# Altium PCB SCMLI_Snipped.PcbDoc (part 5 of 5)
Units mil, origin at the board's own origin, x right, y up, seen from the top; angles counter-clockwise.
Board outline 12129 x 3278 mil, 4 copper layers (Top Layer, GNDPlane, PowRet, Bottom Layer), stack 25.6 mil thick; 452 components, 391 nets, 1786 pads, 827 vias.
Unrouted connection lines stored in the file: 1.
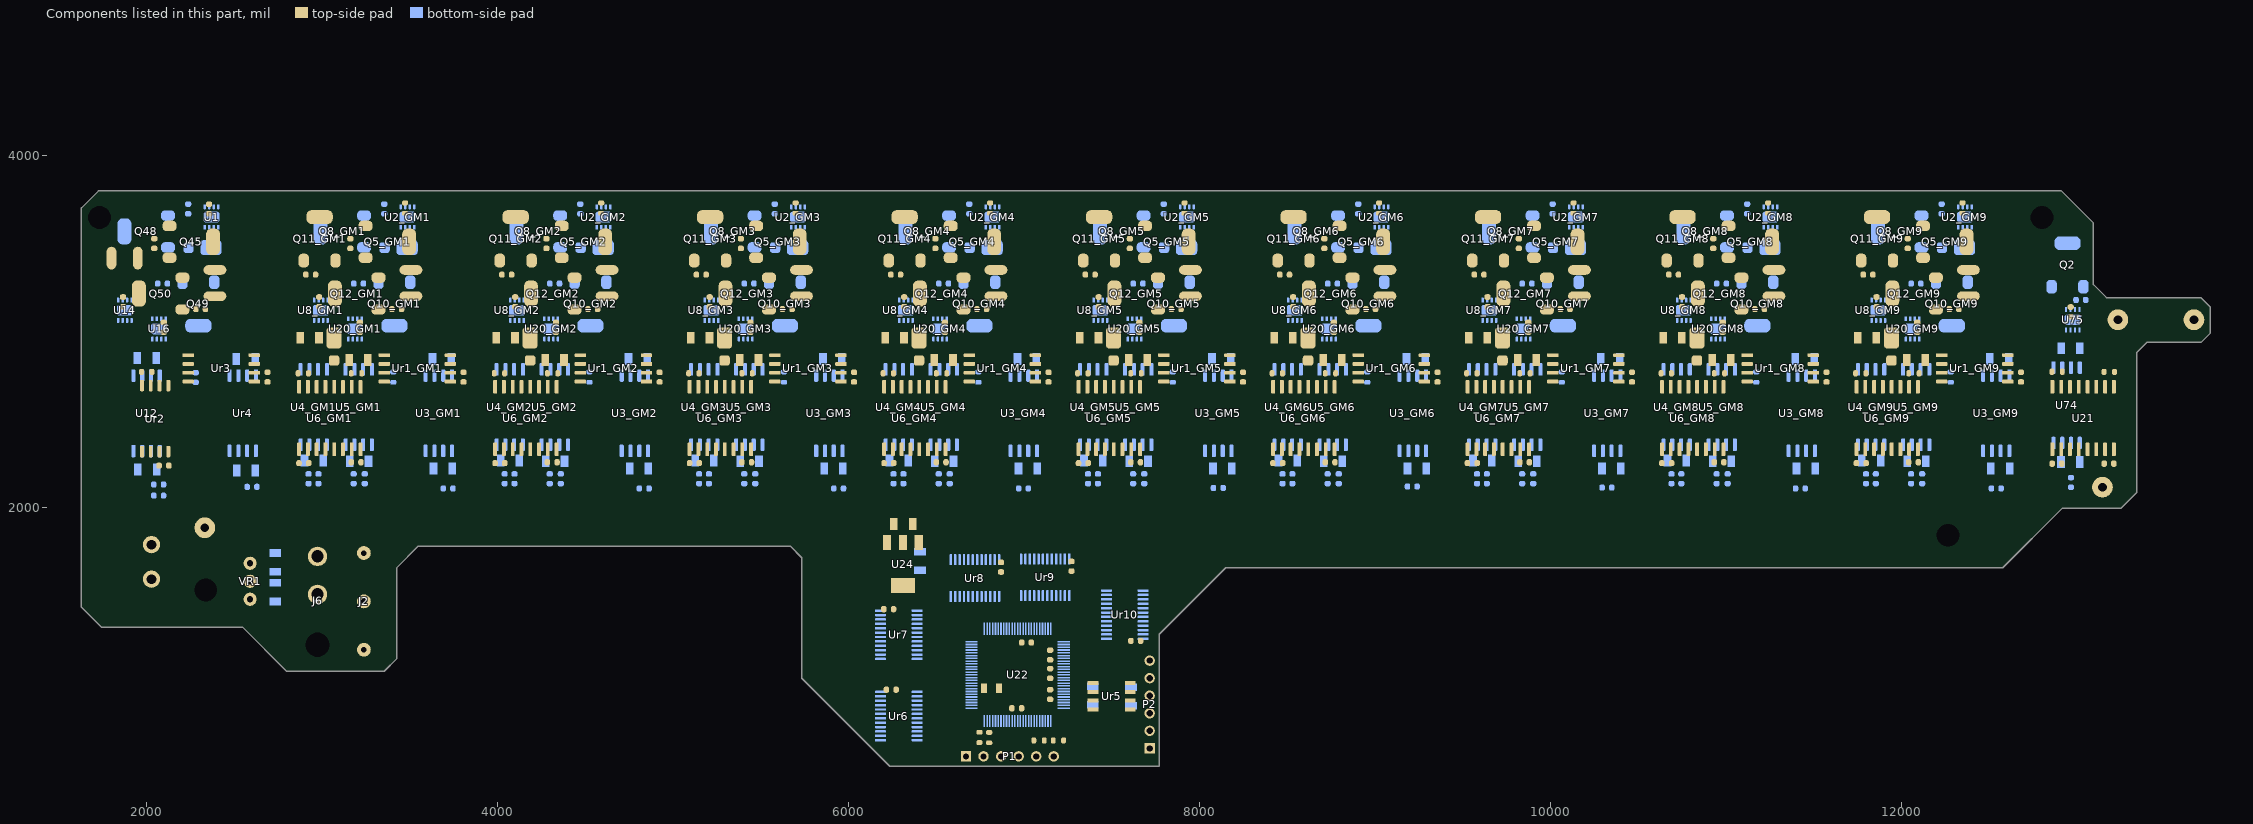
[diagram p7: the components of this part, seen from the top]

## Polygon pours and split planes (outlines as drawn) (continued)
GND on Top Layer "Top Layer-No Net" (solid, pour order 160): 8458,2356 8458,2395 8433,2420 8433,2431 8437,2435 8501.34,2435 8506.34,2430 8506.34,2420 8480,2393.66 8480,2356
REFA_GM5 on Top Layer "Top Layer-No Net" (solid, pour order 98): 7894,3664 7894,3680 cw(c7901,3680) 7901,3687 7960.17,3687 cw(c7960.17,3680) 7967.17,3680 ccw(c7985.17,3680) 7985.17,3662 7989,3662 cw(c7989,3660) 7991,3660 7991,3642 7900,3642 cw(c7900,3648) 7894,3648 7894,3664
REFB_5V_GM5 on Top Layer "Top Layer-No Net" (solid, pour order 107): 7404,2998 7447,2998 ccw(c7447,3013) 7462,3013 cw(c7473,3013) 7473,3024 7508,3024 cw(c7508,3022) 7510,3022 7510,2902 7483,2902 cw(c7483,2922) 7463,2922 ccw(c7454.5,2922) 7454.5,2930.5 7402.5,2930.5 cw(c7402.5,2939) 7394,2939 7394,2988 cw(c7404,2988)
REFC_5V_GM5 on Top Layer "Top Layer-No Net" (solid, pour order 125): 7322,2682 7322,2642 ccw(c7334,2642) 7334,2630 7338,2630 cw(c7338,2625) 7343,2625 7343,2600 cw(c7334,2600) 7334,2591 7309,2591 cw(c7309,2600) 7300,2600 7300,2682
REFA_GM5 on Top Layer "Top Layer-No Net" (solid, pour order 134): 8076,2879 8105,2908 8105,2838 8125.5,2817.5 8105,2797 8105,2740 8120,2725 8171,2725 8181,2715 8181,2704.07 8095.93,2704.07 8095.92,2704.07 cw(c8095.92,2724) 8076,2724
+5V on Top Layer "Top Layer-No Net" (solid, pour order 143): 7287,2367 7292,2372 7318,2372 7322,2368 7322,2236 7315.55,2229.55 7291.45,2229.55 7287,2234
+5V on Top Layer "Top Layer-No Net" (solid, pour order 152): 7550,2366 7552,2368 7621,2368 7624,2365 7624,2241 7620,2237 7556,2237 7550,2243
GND on Top Layer "Top Layer-No Net" (solid, pour order 161): 7350,2356 7350,2395 7325,2420 7325,2431 7329,2435 7393.34,2435 7398.34,2430 7398.34,2420 7372,2393.66 7372,2356
REFA_GM4 on Top Layer "Top Layer-No Net" (solid, pour order 99): 6786,3664 6786,3680 cw(c6793,3680) 6793,3687 6852.17,3687 cw(c6852.17,3680) 6859.17,3680 ccw(c6877.17,3680) 6877.17,3662 6881,3662 cw(c6881,3660) 6883,3660 6883,3642 6792,3642 cw(c6792,3648) 6786,3648 6786,3664
REFB_5V_GM4 on Top Layer "Top Layer-No Net" (solid, pour order 108): 6296,2998 6339,2998 ccw(c6339,3013) 6354,3013 cw(c6365,3013) 6365,3024 6400,3024 cw(c6400,3022) 6402,3022 6402,2902 6375,2902 cw(c6375,2922) 6355,2922 ccw(c6346.5,2922) 6346.5,2930.5 6294.5,2930.5 cw(c6294.5,2939) 6286,2939 6286,2988 cw(c6296,2988)
REFC_5V_GM4 on Top Layer "Top Layer-No Net" (solid, pour order 126): 6214,2682 6214,2642 ccw(c6226,2642) 6226,2630 6230,2630 cw(c6230,2625) 6235,2625 6235,2600 cw(c6226,2600) 6226,2591 6201,2591 cw(c6201,2600) 6192,2600 6192,2682
REFA_GM4 on Top Layer "Top Layer-No Net" (solid, pour order 135): 6968,2879 6997,2908 6997,2838 7017.5,2817.5 6997,2797 6997,2740 7012,2725 7063,2725 7073,2715 7073,2704.07 6987.93,2704.07 6987.92,2704.07 cw(c6987.92,2724) 6968,2724
+5V on Top Layer "Top Layer-No Net" (solid, pour order 144): 6179,2367 6184,2372 6210,2372 6214,2368 6214,2236 6207.55,2229.55 6183.45,2229.55 6179,2234
+5V on Top Layer "Top Layer-No Net" (solid, pour order 153): 6442,2366 6444,2368 6513,2368 6516,2365 6516,2241 6512,2237 6448,2237 6442,2243
GND on Top Layer "Top Layer-No Net" (solid, pour order 162): 6242,2356 6242,2395 6217,2420 6217,2431 6221,2435 6285.34,2435 6290.34,2430 6290.34,2420 6264,2393.66 6264,2356
GND on Top Layer "Top Layer-No Net" (solid, pour order 163): 2909,2356 2909,2395 2884,2420 2884,2431 2888,2435 2952.34,2435 2957.34,2430 2957.34,2420 2931,2393.66 2931,2356
+5V on Top Layer "Top Layer-No Net" (solid, pour order 154): 3109,2366 3111,2368 3180,2368 3183,2365 3183,2241 3179,2237 3115,2237 3109,2243
+5V on Top Layer "Top Layer-No Net" (solid, pour order 145): 2846,2367 2851,2372 2877,2372 2881,2368 2881,2236 2874.55,2229.55 2850.45,2229.55 2846,2234
REFA_GM1 on Top Layer "Top Layer-No Net" (solid, pour order 136): 3635,2879 3664,2908 3664,2838 3684.5,2817.5 3664,2797 3664,2740 3679,2725 3730,2725 3740,2715 3740,2704.07 3654.93,2704.07 3654.92,2704.07 cw(c3654.92,2724) 3635,2724
REFC_5V_GM1 on Top Layer "Top Layer-No Net" (solid, pour order 127): 2881,2682 2881,2642 ccw(c2893,2642) 2893,2630 2897,2630 cw(c2897,2625) 2902,2625 2902,2600 cw(c2893,2600) 2893,2591 2868,2591 cw(c2868,2600) 2859,2600 2859,2682
REFB_5V_GM1 on Top Layer "Top Layer-No Net" (solid, pour order 109): 2963,2998 3006,2998 ccw(c3006,3013) 3021,3013 cw(c3032,3013) 3032,3024 3067,3024 cw(c3067,3022) 3069,3022 3069,2902 3042,2902 cw(c3042,2922) 3022,2922 ccw(c3013.5,2922) 3013.5,2930.5 2961.5,2930.5 cw(c2961.5,2939) 2953,2939 2953,2988 cw(c2963,2988)
REFA_GM1 on Top Layer "Top Layer-No Net" (solid, pour order 100): 3453,3664 3453,3680 cw(c3460,3680) 3460,3687 3519.17,3687 cw(c3519.17,3680) 3526.17,3680 ccw(c3544.17,3680) 3544.17,3662 3548,3662 cw(c3548,3660) 3550,3660 3550,3642 3459,3642 cw(c3459,3648) 3453,3648 3453,3664
+5V on Top Layer "Top Layer-No Net 1" (solid, pour order 208): 6243,1850 6263,1870 6263,1936 6234.55,1936 6196,1897.45 6196,1826 6243,1826
GND on Top Layer "Top Layer-No Net 1" (solid, pour order 210): 6377,1850 6357,1870 6357,1936 6385.45,1936 6424,1897.45 6424,1826 6377,1826
3V3 on Top Layer "Top Layer-No Net 1" (solid, pour order 212): 6286,1754 6286,1641 6241,1596 6241,1509 6380,1509 6380,1557 6442,1619 6442,1661 6353,1661 6334,1680 6334,1754
MCLR on Top Layer "Top Layer-No Net 1" (solid, pour order 216): 7114,688 7165,688 7180,673 7180,590 7155,590 7155,612 7114,653
REFA1 on Top Layer "Top Layer-No Net" (solid, pour order 218): 2518,2879 2547,2908 2547,2838 2567.5,2817.5 2547,2797 2547,2740 2562,2725 2613,2725 2623,2715 2623,2704.07 2537.93,2704.07 2537.92,2704.07 cw(c2537.92,2724) 2518,2724
REFC_5V_GM1 on Top Layer "Top Layer-No Net" (solid, pour order 220): 18 vertices, not listed, extent 3039,2594 3200,2911.71
REFC_5V_GM2 on Top Layer "Top Layer-No Net" (solid, pour order 222): 18 vertices, not listed, extent 4156,2594 4317,2911.71
REFC_5V_GM4 on Top Layer "Top Layer-No Net" (solid, pour order 224): 18 vertices, not listed, extent 6372,2594 6533,2911.71
REFC_5V_GM5 on Top Layer "Top Layer-No Net" (solid, pour order 226): 18 vertices, not listed, extent 7480,2594 7641,2911.71
REFC_5V_GM6 on Top Layer "Top Layer-No Net" (solid, pour order 228): 18 vertices, not listed, extent 8588,2594 8749,2911.71
REFC_5V_GM7 on Top Layer "Top Layer-No Net" (solid, pour order 230): 18 vertices, not listed, extent 9696,2594 9857,2911.71
REFC_5V_GM8 on Top Layer "Top Layer-No Net" (solid, pour order 232): 18 vertices, not listed, extent 10804,2594 10965,2911.71
REFC_5V_GM9 on Top Layer "Top Layer-No Net" (solid, pour order 234): 18 vertices, not listed, extent 11912,2594 12073,2911.71
OUT_LOW10 on Bottom Layer "Top Layer-No Net" (solid, pour order 205): 12825,3101 12825,3254 12853.46,3254 12854.45,3254.98 12883,3254.98 12883,3110 12904,3089 12904,3082.5 12806.5,3082.5
OUT_LOW10 on Bottom Layer "Top Layer-No Net" (solid, pour order 204): 12855,3012 12833,3034 12902,3034 12902,2966 12931,2937 12931,2870 12913,2870 12876,2833 12876,2816 12857,2816 12855,2818
GND on Bottom Layer "Top Layer-No Net" (solid, pour order 200): 13112,2348.48 13112,2391.5 13096,2407.5 13096,2431.5 13102,2437.5 13148,2437.5 13153,2432.5 13153,2409.5 13134,2390.5 13134,2348.48
GND on Bottom Layer "Top Layer-No Net" (solid, pour order 199): 12856,2351.98 12856,2395 12840,2411 12840,2435 12846,2441 12892,2441 12897,2436 12897,2413 12878,2394 12878,2351.98
GND on Bottom Layer "Top Layer-No Net" (solid, pour order 164): 3984,2351.98 3984,2395 3968,2411 3968,2435 3974,2441 4020,2441 4025,2436 4025,2413 4006,2394 4006,2351.98
GND on Bottom Layer "Top Layer-No Net" (solid, pour order 173): 4240,2348.48 4240,2391.5 4224,2407.5 4224,2431.5 4230,2437.5 4276,2437.5 4281,2432.5 4281,2409.5 4262,2390.5 4262,2348.48
GND on Bottom Layer "Top Layer-No Net" (solid, pour order 165): 5092,2351.98 5092,2395 5076,2411 5076,2435 5082,2441 5128,2441 5133,2436 5133,2413 5114,2394 5114,2351.98
GND on Bottom Layer "Top Layer-No Net" (solid, pour order 174): 5348,2348.48 5348,2391.5 5332,2407.5 5332,2431.5 5338,2437.5 5384,2437.5 5389,2432.5 5389,2409.5 5370,2390.5 5370,2348.48
GND on Bottom Layer "Top Layer-No Net" (solid, pour order 166): 10632,2351.98 10632,2395 10616,2411 10616,2435 10622,2441 10668,2441 10673,2436 10673,2413 10654,2394 10654,2351.98
GND on Bottom Layer "Top Layer-No Net" (solid, pour order 175): 10888,2348.48 10888,2391.5 10872,2407.5 10872,2431.5 10878,2437.5 10924,2437.5 10929,2432.5 10929,2409.5 10910,2390.5 10910,2348.48
GND on Bottom Layer "Top Layer-No Net" (solid, pour order 167): 11740,2351.98 11740,2395 11724,2411 11724,2435 11730,2441 11776,2441 11781,2436 11781,2413 11762,2394 11762,2351.98
GND on Bottom Layer "Top Layer-No Net" (solid, pour order 176): 11996,2348.48 11996,2391.5 11980,2407.5 11980,2431.5 11986,2437.5 12032,2437.5 12037,2432.5 12037,2409.5 12018,2390.5 12018,2348.48
GND on Bottom Layer "Top Layer-No Net" (solid, pour order 168): 9524,2351.98 9524,2395 9508,2411 9508,2435 9514,2441 9560,2441 9565,2436 9565,2413 9546,2394 9546,2351.98
GND on Bottom Layer "Top Layer-No Net" (solid, pour order 177): 9780,2348.48 9780,2391.5 9764,2407.5 9764,2431.5 9770,2437.5 9816,2437.5 9821,2432.5 9821,2409.5 9802,2390.5 9802,2348.48
GND on Bottom Layer "Top Layer-No Net" (solid, pour order 169): 8416,2351.98 8416,2395 8400,2411 8400,2435 8406,2441 8452,2441 8457,2436 8457,2413 8438,2394 8438,2351.98
GND on Bottom Layer "Top Layer-No Net" (solid, pour order 178): 8672,2348.48 8672,2391.5 8656,2407.5 8656,2431.5 8662,2437.5 8708,2437.5 8713,2432.5 8713,2409.5 8694,2390.5 8694,2348.48
GND on Bottom Layer "Top Layer-No Net" (solid, pour order 170): 7308,2351.98 7308,2395 7292,2411 7292,2435 7298,2441 7344,2441 7349,2436 7349,2413 7330,2394 7330,2351.98
GND on Bottom Layer "Top Layer-No Net" (solid, pour order 179): 7564,2348.48 7564,2391.5 7548,2407.5 7548,2431.5 7554,2437.5 7600,2437.5 7605,2432.5 7605,2409.5 7586,2390.5 7586,2348.48
GND on Bottom Layer "Top Layer-No Net" (solid, pour order 171): 6200,2351.98 6200,2395 6184,2411 6184,2435 6190,2441 6236,2441 6241,2436 6241,2413 6222,2394 6222,2351.98
GND on Bottom Layer "Top Layer-No Net" (solid, pour order 180): 6456,2348.48 6456,2391.5 6440,2407.5 6440,2431.5 6446,2437.5 6492,2437.5 6497,2432.5 6497,2409.5 6478,2390.5 6478,2348.48
GND on Bottom Layer "Top Layer-No Net" (solid, pour order 181): 3123,2348.48 3123,2391.5 3107,2407.5 3107,2431.5 3113,2437.5 3159,2437.5 3164,2432.5 3164,2409.5 3145,2390.5 3145,2348.48
GND on Bottom Layer "Top Layer-No Net" (solid, pour order 172): 2867,2351.98 2867,2395 2851,2411 2851,2435 2857,2441 2903,2441 2908,2436 2908,2413 2889,2394 2889,2351.98
3V3 on Bottom Layer "Top Layer-No Net 1" (solid, pour order 214): 6361,1661 6354,1654 6354,1596.42 6367.42,1583 6431,1583 6442,1594 6442,1661
GND on GNDPlane (split plane): 342 vertices, not listed, extent 1781.5,543.1 13318.9,3334
REFA_GM8 on PowRet (split plane): 11391.34,3657.2 11391.34,3568.8 11360.61,3538.08 11301.83,3538 11179.54,3538 11151.08,3566.46 11151.08,3660.82 11184.18,3693.92 11354.61,3693.92
REFA_GM9 on PowRet (split plane): 12499.34,3657.2 12499.34,3568.8 12468.61,3538.08 12409.83,3538 12287.54,3538 12259.08,3566.46 12259.08,3660.82 12292.18,3693.92 12462.61,3693.92
REFA_GM7 on PowRet (split plane): 10283.34,3657.2 10283.34,3568.8 10252.61,3538.08 10193.83,3538 10071.54,3538 10043.08,3566.46 10043.08,3660.82 10076.18,3693.92 10246.61,3693.92
OUT_LOW9 on PowRet (split plane): 26 vertices, not listed, extent 11715,2917.08 12053.92,3459.92
REFC_GM9 on PowRet (split plane): 19 vertices, not listed, extent 12043.08,2892 12423.92,3223.92
OUT_LOW8 on PowRet (split plane): 26 vertices, not listed, extent 10607,2917.08 10945.92,3459.92
REFA_GM6 on PowRet (split plane): 9175.34,3657.2 9175.34,3568.8 9144.61,3538.08 9085.83,3538 8963.54,3538 8935.08,3566.46 8935.08,3660.82 8968.18,3693.92 9138.61,3693.92
OUT_LOW7 on PowRet (split plane): 26 vertices, not listed, extent 9499,2917.08 9837.92,3459.92
REFA_GM5 on PowRet (split plane): 8067.34,3657.2 8067.34,3568.8 8036.61,3538.08 7977.83,3538 7855.54,3538 7827.08,3566.46 7827.08,3660.82 7860.18,3693.92 8030.61,3693.92
OUT_LOW6 on PowRet (split plane): 26 vertices, not listed, extent 8391,2917.08 8729.92,3459.92
OUT_LOW5 on PowRet (split plane): 26 vertices, not listed, extent 7283,2917.08 7621.92,3459.92
REFC_GM8 on PowRet (split plane): 19 vertices, not listed, extent 10935.08,2892 11315.92,3223.92
REFC_5V_GM9 on PowRet (split plane): 12275.58,2763.96 12295.92,2743.61 12295.92,2632.46 12252.54,2589.08 11766.39,2589.08 11743.15,2612.31 11743.15,2640.69 11777.39,2674.92 12106.39,2674.92 12209.73,2778.27 12261.27,2778.27
REFC_GM7 on PowRet (split plane): 19 vertices, not listed, extent 9827.08,2892 10207.92,3223.92
REFB11_5V on PowRet (split plane): 13241,2656.31 13241,2612.31 13222.39,2590.71 12880.75,2590.71 12859.15,2612.31 12859.15,2640.69 12893.39,2674.92 13222.39,2674.92
REFC_5V_GM8 on PowRet (split plane): 11167.58,2763.96 11187.92,2743.61 11187.92,2632.46 11144.54,2589.08 10658.39,2589.08 10635.15,2612.31 10635.15,2640.69 10669.39,2674.92 10998.39,2674.92 11101.73,2778.27 11153.27,2778.27
REFC_GM6 on PowRet (split plane): 19 vertices, not listed, extent 8719.08,2892 9099.92,3223.92
REFC_5V_GM7 on PowRet (split plane): 10059.58,2763.96 10079.92,2743.61 10079.92,2632.46 10036.54,2589.08 9550.39,2589.08 9527.15,2612.31 9527.15,2640.69 9561.39,2674.92 9890.39,2674.92 9993.73,2778.27 10045.27,2778.27
REFC_GM5 on PowRet (split plane): 19 vertices, not listed, extent 7611.08,2892 7991.92,3223.92
REFC_5V_GM6 on PowRet (split plane): 8951.58,2763.96 8971.92,2743.61 8971.92,2632.46 8928.54,2589.08 8442.39,2589.08 8419.15,2612.31 8419.15,2640.69 8453.39,2674.92 8782.39,2674.92 8885.73,2778.27 8937.27,2778.27
REFC_5V_GM5 on PowRet (split plane): 7843.58,2763.96 7863.92,2743.61 7863.92,2632.46 7820.54,2589.08 7334.39,2589.08 7311.15,2612.31 7311.15,2640.69 7345.39,2674.92 7674.39,2674.92 7777.73,2778.27 7829.27,2778.27
REFA_GM4 on PowRet (split plane): 6959.34,3657.2 6959.34,3568.8 6928.61,3538.08 6869.83,3538 6747.54,3538 6719.08,3566.46 6719.08,3660.82 6752.18,3693.92 6922.61,3693.92
OUT_LOW4 on PowRet (split plane): 26 vertices, not listed, extent 6175,2917.08 6513.92,3459.92
REFA_GM3 on PowRet (split plane): 5851.34,3657.2 5851.34,3568.8 5820.61,3538.08 5761.83,3538 5639.54,3538 5611.08,3566.46 5611.08,3660.82 5644.18,3693.92 5814.61,3693.92
REFC_GM3 on PowRet (split plane): 19 vertices, not listed, extent 5395.08,2892 5775.92,3223.92
REFC_GM4 on PowRet (split plane): 19 vertices, not listed, extent 6503.08,2892 6883.92,3223.92
OUT_LOW3 on PowRet (split plane): 26 vertices, not listed, extent 5067,2917.08 5405.92,3459.92
REFA_GM1 on PowRet (split plane): 3626.34,3657.2 3626.34,3568.8 3595.61,3538.08 3414.46,3538.08 3386.08,3566.46 3386.08,3660.82 3419.18,3693.92 3589.61,3693.92
REFA_GM2 on PowRet (split plane): 4743.34,3657.2 4743.34,3568.8 4712.61,3538.08 4653.83,3538 4531.54,3538 4503.08,3566.46 4503.08,3660.82 4536.18,3693.92 4706.61,3693.92
REFC1 on PowRet (split plane): 2509.34,3657.2 2509.34,3568.8 2478.61,3538.08 2419.83,3538 2297.54,3538 2269.08,3566.46 2269.08,3660.82 2302.18,3693.92 2472.61,3693.92
OUT_LOW2 on PowRet (split plane): 26 vertices, not listed, extent 3959,2917.08 4297.92,3459.92
REFB2 on PowRet (split plane): 36 vertices, not listed, extent 2842,2917.08 3180.92,3459.92
REFC_GM2 on PowRet (split plane): 19 vertices, not listed, extent 4287.08,2892 4667.92,3223.92
REFC_5V_GM4 on PowRet (split plane): 6735.58,2763.96 6755.92,2743.61 6755.92,2632.46 6712.54,2589.08 6226.39,2589.08 6203.15,2612.31 6203.15,2640.69 6237.39,2674.92 6566.39,2674.92 6669.73,2778.27 6721.27,2778.27
+5V on PowRet (split plane): 375 vertices, not listed, extent 1788.5,543.1 13302.61,3310
3V3 on PowRet (split plane): 7564.92,1520.61 7564.92,543.1 6324.08,543.1 6324.08,1578.61 6362.39,1616.92 7468.61,1616.92
REFC_5V_GM3 on PowRet (split plane): 5627.58,2763.96 5647.92,2743.61 5647.92,2632.46 5604.54,2589.08 5118.39,2589.08 5095.15,2612.31 5095.15,2640.69 5129.39,2674.92 5458.39,2674.92 5561.73,2778.27 5613.27,2778.27
REFC_GM1 on PowRet (split plane): 23 vertices, not listed, extent 3170.08,2892 3550.92,3223.92
REFC_5V_GM2 on PowRet (split plane): 4519.58,2763.96 4539.92,2743.61 4539.92,2632.46 4496.54,2589.08 4010.39,2589.08 3987.15,2612.31 3987.15,2640.69 4021.39,2674.92 4350.39,2674.92 4453.73,2778.27 4505.27,2778.27
REFC1 on PowRet (split plane): 19 vertices, not listed, extent 2053.08,2892 2433.92,3223.92
REFC_5V_GM1 on PowRet (split plane): 3402.58,2763.96 3422.92,2743.61 3422.92,2632.46 3379.54,2589.08 2893.39,2589.08 2870.15,2612.31 2870.15,2640.69 2904.39,2674.92 3233.39,2674.92 3336.73,2778.27 3388.27,2778.27
REFC1_5V on PowRet (split plane): 2285.58,2763.96 2305.92,2743.61 2305.92,2632.46 2262.54,2589.08 1968.27,2589.08 1954.32,2603.03 1954.32,2664.32 1943.71,2653.71 1964.92,2674.92 2116.39,2674.92 2219.73,2778.27 2271.27,2778.27

## Keep-outs
Keep-Out Layer:
  lines w10: 1630,1434 1745,1319 1866,1319 2542,1319 2798,1063 2893,1063 3353,1063 3427,1137 3427,1651 3547,1771 5672,1771 5734,1709 5734,1025 6235,524 6236,524 7728,524 7769,524 7769,1273 8150,1654 12578,1654 12916,1992 12986,1992 13247,1992 13339,2084 13339,2880 13397,2938 13711,2938 13760,2987 13760,3137 13704,3193 13168,3193 13093,3268 13093,3617 12909,3801 11672,3801 11672,3556 11602,3556 11602,3801 10564,3801 10564,3556 10494,3556 10494,3801 9456,3801 9456,3556 9386,3556 9386,3801 8348,3801 8348,3556 8278,3556 8278,3801 7241,3801 7241,3556 7170,3556 7170,3801 6131,3801 6131,3556 6062,3556 6062,3801 5026,3801 5026,3555 4954,3555 4954,3802 3907,3802 3907,3556 3837,3556 3836,3557 3836,3801 2789,3801 2790,3800 2790,3556 2720,3556 2719,3557 2719,3803 2718,3802 1734,3802 1730,3798 1630,3698 1630,1434 ; 2720,2083 2790,2083 2790,2951 2720,2951 2720,2083 ; 2720,3096 2720,3423 2790,3423 2790,3096 2720,3096 ; 3837,2083 3837,2951 3907,2951 3907,2083 3837,2083 ; 3837,3096 3907,3096 3907,3423 3837,3423 3837,3096 ; 4954,2083 4954,2951 5024,2951 5024,2083 4954,2083 ; 4954,3096 5024,3096 5024,3423 4954,3423 4954,3096 ; 6062,2083 6062,2951 6132,2951 6132,2083 6062,2083 ; 6062,3096 6132,3096 6132,3423 6062,3423 6062,3096 ; 7170,2083 7170,2951 7240,2951 7240,2083 7170,2083 ; 7170,3096 7240,3096 7240,3423 7170,3423 7170,3096 ; 8278,2083 8278,2951 8348,2951 8348,2083 8278,2083 ; 8278,3096 8348,3096 8348,3423 8278,3423 8278,3096 ; 9386,2083 9386,2951 9456,2951 9456,2083 9386,2083 ; 9386,3096 9456,3096 9456,3423 9386,3423 9386,3096 ; 10494,2083 10494,2951 10564,2951 10564,2083 10494,2083 ; 10494,3096 10564,3096 10564,3423 10494,3423 10494,3096 ; 11602,2083 11602,2951 11672,2951 11672,2083 11602,2083 ; 11602,3096 11672,3096 11672,3423 11602,3423 11602,3096 ; 12710,2083 12710,2951 12780,2951 12780,2083 12710,2083 ; 12710,3096 12780,3096 12780,3423 12710,3423 12710,3096

## Other copper
Top Layer:
  region: 4369,1627
  region net 9V: 4361,1627
Bottom Layer:
  region net +5V: 2649,1717 2740,1717 2740,1810.49 2544,1811.49 2544,1740 2544,1671.09 2565.33,1642 2619,1642 2637.26,1666.9 2637.95,1705.95
  region net OUT_LOW10: 12291.72,3082.5 12806.5,3082.5 12822,3098 12975,3098 12975,3036 12913,3036 12902,3025 12842,3025 12829,3038 12402.72,3038 12368.72,3004 12291.72,3004
  region net REFB2: 2296,3072.5 2832.5,3072.5 2912,3152 2998,3152 2998,3090 2916,3090 2901,3075 2901,2917 2888,2904 2868,2904 2744,3028 2407,3028 2373,2994 2296,2994
  region net OUT_LOW9: 11178,3072.5 11714.5,3072.5 11794,3152 11880,3152 11880,3090 11798,3090 11783,3075 11783,2917 11770,2904 11750,2904 11626,3028 11289,3028 11255,2994 11178,2994
  region net OUT_LOW8: 10070,3072.5 10606.5,3072.5 10686,3152 10772,3152 10772,3090 10690,3090 10675,3075 10675,2917 10662,2904 10642,2904 10518,3028 10181,3028 10147,2994 10070,2994
  region net OUT_LOW7: 8962,3072.5 9498.5,3072.5 9578,3152 9664,3152 9664,3090 9582,3090 9567,3075 9567,2917 9554,2904 9534,2904 9410,3028 9073,3028 9039,2994 8962,2994
  region net OUT_LOW6: 7854,3072.5 8390.5,3072.5 8470,3152 8556,3152 8556,3090 8474,3090 8459,3075 8459,2917 8446,2904 8426,2904 8302,3028 7965,3028 7931,2994 7854,2994
  region net OUT_LOW5: 6746,3072.5 7282.5,3072.5 7362,3152 7448,3152 7448,3090 7366,3090 7351,3075 7351,2917 7338,2904 7318,2904 7194,3028 6857,3028 6823,2994 6746,2994
  region net OUT_LOW4: 5638,3072.5 6174.5,3072.5 6254,3152 6340,3152 6340,3090 6258,3090 6243,3075 6243,2917 6230,2904 6210,2904 6086,3028 5749,3028 5715,2994 5638,2994
  region net OUT_LOW3: 4530,3072.5 5066.5,3072.5 5146,3152 5232,3152 5232,3090 5150,3090 5135,3075 5135,2917 5122,2904 5102,2904 4978,3028 4641,3028 4607,2994 4530,2994
  region net OUT_LOW2: 3413,3072.5 3949.5,3072.5 4029,3152 4115,3152 4115,3090 4033,3090 4018,3075 4018,2917 4005,2904 3985,2904 3861,3028 3524,3028 3490,2994 3413,2994
GNDPlane (plane layer: these items are gaps in the copper):
  region: 1781.5,3801 1781.5,1316 1630,1316 1630,3801
  region: 1982,3272 1920,3334 1833,3334 1630,3131 1630,3801 1982,3801
  region: 1887,2480 1864,2503 1864,2928 1987,3051 2029,3051 2033,3047 2033,3033 2033,2480
  region: 2236,2091 2269,2058 2383,2058 2421,2096 2421,2457 2465,2501 2465,2531 2171,2531 2171,2516 2236,2451
  region: 12226,2091 12259,2058 12373,2058 12411,2096 12411,2457 12455,2501 12455,2531 12161,2531 12161,2516 12226,2451
  region: 11118,2091 11151,2058 11265,2058 11303,2096 11303,2457 11347,2501 11347,2531 11053,2531 11053,2516 11118,2451
  region: 10010,2091 10043,2058 10157,2058 10195,2096 10195,2457 10239,2501 10239,2531 9945,2531 9945,2516 10010,2451
  region: 8902,2091 8935,2058 9049,2058 9087,2096 9087,2457 9131,2501 9131,2531 8837,2531 8837,2516 8902,2451
  region: 7794,2091 7827,2058 7941,2058 7979,2096 7979,2457 8023,2501 8023,2531 7729,2531 7729,2516 7794,2451
  region: 6686,2091 6719,2058 6833,2058 6871,2096 6871,2457 6915,2501 6915,2531 6621,2531 6621,2516 6686,2451
  region: 5578,2091 5611,2058 5725,2058 5763,2096 5763,2457 5807,2501 5807,2531 5513,2531 5513,2516 5578,2451
  region: 4470,2091 4503,2058 4617,2058 4655,2096 4655,2457 4699,2501 4699,2531 4405,2531 4405,2516 4470,2451
  region: 3353,2091 3386,2058 3500,2058 3538,2096 3538,2457 3582,2501 3582,2531 3288,2531 3288,2516 3353,2451
  region: 1982,3801 1982,2480 13759,2480 13759,3801
PowRet (plane layer: these items are gaps in the copper):
  region: 12751,3800 13759,3800 13759,2834 12765,2834 12765,2815 12751,2815
  region: 13386,2939.63 13386,2061.63 13316,2061.63 13284,2093.63 13284,2454.63 13257,2481.63 12723,2481.63 12723,2590.71 13222.39,2590.71 13241,2612.31 13241,2656.31 13222.39,2674.92 13257,2810.63
  region: 12910.69,2917.08 12841.39,2917.08 12831,2927.46 12780,2927.46 12780,2589.08 12882.39,2589.08 12859.15,2612.31 12859.15,2640.69 12893.39,2674.92 13222.39,2674.92 13325.73,2778.27 13339,2778.27 13339,2892 12935.77,2892
  region: 1788.5,3801 1788.5,1316 1630,1316 1630,3801
  region: 1954.32,2603.03 1968.27,2589.08 1943.71,2589.08 1943.71,2653.71 1954.32,2664.32
  region: 2469,3801 2791,3800.61 2791,2480 2445.96,2480 2420,2454.04 2420,2095 2385,2060 2267,2060 2235,2092 2235,2453 2208,2480 1861,2480 1861,2589.08 2262.54,2589.08 2305.92,2632.46 2305.92,2743.61 2285.58,2763.96 2285.58,2886.58 2433.92,3034.92 2433.92,3209.83 2419.83,3223.92 2419.83,3538 2478.61,3538.08 2509.34,3568.8 2509.34,3657.2 2469,3697.54
  region: 1861,2892 1861,2589.08 1943.71,2589.08 1943.71,2653.71 1964.92,2674.92 2116.39,2674.92 2219.73,2778.27 2271.27,2778.27 2305.92,2743.61 2305.92,2906.92 2291,2892
  region: 11794.69,2917.08 11725.39,2917.08 11715,2927.46 11664,2927.46 11664,2589.08 11766.39,2589.08 11743.15,2612.31 11743.15,2640.69 11777.39,2674.92 12106.39,2674.92 12209.73,2778.27 12261.27,2778.27 12295.92,2743.61 12295.92,2906.92 12281,2892 11819.77,2892
  region: 10686.69,2917.08 10617.39,2917.08 10607,2927.46 10556,2927.46 10556,2589.08 10658.39,2589.08 10635.15,2612.31 10635.15,2640.69 10669.39,2674.92 10998.39,2674.92 11101.73,2778.27 11153.27,2778.27 11187.92,2743.61 11187.92,2906.92 11173,2892 10711.77,2892
  region: 9578.69,2917.08 9509.39,2917.08 9499,2927.46 9448,2927.46 9448,2589.08 9550.39,2589.08 9527.15,2612.31 9527.15,2640.69 9561.39,2674.92 9890.39,2674.92 9993.73,2778.27 10045.27,2778.27 10079.92,2743.61 10079.92,2906.92 10065,2892 9603.77,2892
  region: 8470.69,2917.08 8401.39,2917.08 8391,2927.46 8340,2927.46 8340,2589.08 8442.39,2589.08 8419.15,2612.31 8419.15,2640.69 8453.39,2674.92 8782.39,2674.92 8885.73,2778.27 8937.27,2778.27 8971.92,2743.61 8971.92,2906.92 8957,2892 8495.77,2892
  region: 7362.69,2917.08 7293.39,2917.08 7283,2927.46 7232,2927.46 7232,2589.08 7334.39,2589.08 7311.15,2612.31 7311.15,2640.69 7345.39,2674.92 7674.39,2674.92 7777.73,2778.27 7829.27,2778.27 7863.92,2743.61 7863.92,2906.92 7849,2892 7387.77,2892
  region: 6254.69,2917.08 6185.39,2917.08 6175,2927.46 6124,2927.46 6124,2589.08 6226.39,2589.08 6203.15,2612.31 6203.15,2640.69 6237.39,2674.92 6566.39,2674.92 6669.73,2778.27 6721.27,2778.27 6755.92,2743.61 6755.92,2906.92 6741,2892 6279.77,2892
  region: 5146.69,2917.08 5077.39,2917.08 5067,2927.46 5016,2927.46 5016,2589.08 5118.39,2589.08 5095.15,2612.31 5095.15,2640.69 5129.39,2674.92 5458.39,2674.92 5561.73,2778.27 5613.27,2778.27 5647.92,2743.61 5647.92,2906.92 5633,2892 5171.77,2892
  region: 4038.69,2917.08 3969.39,2917.08 3959,2927.46 3908,2927.46 3908,2589.08 4010.39,2589.08 3987.15,2612.31 3987.15,2640.69 4021.39,2674.92 4350.39,2674.92 4453.73,2778.27 4505.27,2778.27 4539.92,2743.61 4539.92,2906.92 4525,2892 4063.77,2892
  region: 2921.69,2917.08 2852.39,2917.08 2842,2927.46 2791,2927.46 2791,2589.08 2893.39,2589.08 2870.15,2612.31 2870.15,2640.69 2904.39,2674.92 3233.39,2674.92 3336.73,2778.27 3388.27,2778.27 3422.92,2743.61 3422.92,2906.92 3408,2892 2946.77,2892
  region: 12459,3801 12781,3800.61 12781,2480 12435.96,2480 12410,2454.04 12410,2095 12375,2060 12257,2060 12225,2092 12225,2453 12198,2480 11664,2480 11664,2589.08 12252.54,2589.08 12295.92,2632.46 12295.92,2743.61 12275.58,2763.96 12275.58,2886.58 12423.92,3034.92 12423.92,3209.83 12409.83,3223.92 12409.83,3538 12468.61,3538.08 12499.34,3568.8 12499.34,3657.2 12459,3697.54
  region: 11351,3801 11673,3800.61 11673,2480 11327.96,2480 11302,2454.04 11302,2095 11267,2060 11149,2060 11117,2092 11117,2453 11090,2480 10556,2480 10556,2589.08 11144.54,2589.08 11187.92,2632.46 11187.92,2743.61 11167.58,2763.96 11167.58,2886.58 11315.92,3034.92 11315.92,3209.83 11301.83,3223.92 11301.83,3538 11360.61,3538.08 11391.34,3568.8 11391.34,3657.2 11351,3697.54
  region: 10243,3801 10565,3800.61 10565,2480 10219.96,2480 10194,2454.04 10194,2095 10159,2060 10041,2060 10009,2092 10009,2453 9982,2480 9448,2480 9448,2589.08 10036.54,2589.08 10079.92,2632.46 10079.92,2743.61 10059.58,2763.96 10059.58,2886.58 10207.92,3034.92 10207.92,3209.83 10193.83,3223.92 10193.83,3538 10252.61,3538.08 10283.34,3568.8 10283.34,3657.2 10243,3697.54
  region: 9135,3801 9457,3800.61 9457,2480 9111.96,2480 9086,2454.04 9086,2095 9051,2060 8933,2060 8901,2092 8901,2453 8874,2480 8340,2480 8340,2589.08 8928.54,2589.08 8971.92,2632.46 8971.92,2743.61 8951.58,2763.96 8951.58,2886.58 9099.92,3034.92 9099.92,3209.83 9085.83,3223.92 9085.83,3538 9144.61,3538.08 9175.34,3568.8 9175.34,3657.2 9135,3697.54
  region: 8027,3801 8349,3800.61 8349,2480 8003.96,2480 7978,2454.04 7978,2095 7943,2060 7825,2060 7793,2092 7793,2453 7766,2480 7232,2480 7232,2589.08 7820.54,2589.08 7863.92,2632.46 7863.92,2743.61 7843.58,2763.96 7843.58,2886.58 7991.92,3034.92 7991.92,3209.83 7977.83,3223.92 7977.83,3538 8036.61,3538.08 8067.34,3568.8 8067.34,3657.2 8027,3697.54
  region: 6919,3801 7241,3800.61 7241,2480 6895.96,2480 6870,2454.04 6870,2095 6835,2060 6717,2060 6685,2092 6685,2453 6658,2480 6124,2480 6124,2589.08 6712.54,2589.08 6755.92,2632.46 6755.92,2743.61 6735.58,2763.96 6735.58,2886.58 6883.92,3034.92 6883.92,3209.83 6869.83,3223.92 6869.83,3538 6928.61,3538.08 6959.34,3568.8 6959.34,3657.2 6919,3697.54
  region: 5811,3801 6133,3800.61 6133,2480 5787.96,2480 5762,2454.04 5762,2095 5727,2060 5609,2060 5577,2092 5577,2453 5550,2480 5016,2480 5016,2589.08 5604.54,2589.08 5647.92,2632.46 5647.92,2743.61 5627.58,2763.96 5627.58,2886.58 5775.92,3034.92 5775.92,3209.83 5761.83,3223.92 5761.83,3538 5820.61,3538.08 5851.34,3568.8 5851.34,3657.2 5811,3697.54
  region: 4703,3801 5025,3800.61 5025,2480 4679.96,2480 4654,2454.04 4654,2095 4619,2060 4501,2060 4469,2092 4469,2453 4442,2480 3908,2480 3908,2589.08 4496.54,2589.08 4539.92,2632.46 4539.92,2743.61 4519.58,2763.96 4519.58,2886.58 4667.92,3034.92 4667.92,3209.83 4653.83,3223.92 4653.83,3538 4712.61,3538.08 4743.34,3568.8 4743.34,3657.2 4703,3697.54
  region: 3586,3801 3908,3800.61 3908,2480 3562.96,2480 3537,2454.04 3537,2095 3502,2060 3384,2060 3352,2092 3352,2453 3325,2480 2791,2480 2791,2589.08 3379.54,2589.08 3422.92,2632.46 3422.92,2743.61 3402.58,2763.96 3402.58,2886.58 3550.92,3034.92 3550.92,3209.83 3536.83,3223.92 3536.83,3538 3595.61,3538.08 3626.34,3568.8 3626.34,3657.2 3586,3697.54
  region: 2791,3801 2791,3031.75 2791.15,3031.75
  region: 2385.4,1864
  region: 2271,673
  region: 10873.12,669
  region: 1986,4550
  region: 1986,4550
  region: 1630,3801 1630,2920.53 1839,3139.96 1839,3275 1874,3310 1966,3310 1992.92,3283.08 1992.92,3243 1992.92,3105.31 1861,2973.39 1861,2924 1861,2867 2029.97,2867 2050.34,2846.63 ccw(c2061.53,2857.83) 2061.53,2842 2076,2842 2076,2891.46 2053.08,2914.39 2053.08,2966.13 2094.87,3007.92 2215.6,3007.92 ccw(c2215.6,3032.83) 2233.22,3015.22 2312.74,3094.74 2312.74,3209.71 2326.95,3223.92 2419.83,3223.92 2419.83,3538 2297.54,3538 2269.08,3566.46 2269.08,3660.82 2302.18,3693.92 2472.61,3693.92 2472.61,3800.61 2473,3801
  region: 11664,3801 11664,2866.92 11715,2866.92 11715,3015.54 11818.73,3119.27 ccw(c11801.19,3136.81) 11826,3136.81 11826,3316.12 11969.8,3459.92 12021.61,3459.92 12053.92,3427.61 12053.92,3324.39 11990.27,3260.73 ccw(c12008,3243) 11982.92,3243 11982.92,3105.31 11794.69,2917.08 11794.69,2867.69 11794,2867 12019.97,2867 12040.34,2846.63 ccw(c12051.53,2857.82) 12051.53,2842 12066,2842 12066,2891.46 12043.08,2914.39 12043.08,2966.13 12084.87,3007.92 12205.6,3007.92 ccw(c12205.6,3032.83) 12223.22,3015.22 12302.74,3094.74 12302.74,3209.71 12316.95,3223.92 12409.83,3223.92 12409.83,3538 12287.54,3538 12259.08,3566.46 12259.08,3660.82 12292.18,3693.92 12462.61,3693.92 12462.61,3800.61 12463,3801
  region: 10556,3801 10556,2866.92 10607,2866.92 10607,3015.54 10710.73,3119.27 ccw(c10693.19,3136.81) 10718,3136.81 10718,3316.12 10861.8,3459.92 10913.61,3459.92 10945.92,3427.61 10945.92,3324.39 10882.27,3260.73 ccw(c10900,3243) 10874.92,3243 10874.92,3105.31 10686.69,2917.08 10686.69,2867.69 10686,2867 10911.97,2867 10932.34,2846.63 ccw(c10943.53,2857.82) 10943.53,2842 10958,2842 10958,2891.46 10935.08,2914.39 10935.08,2966.13 10976.87,3007.92 11097.6,3007.92 ccw(c11097.6,3032.83) 11115.22,3015.22 11194.74,3094.74 11194.74,3209.71 11208.95,3223.92 11301.83,3223.92 11301.83,3538 11179.54,3538 11151.08,3566.46 11151.08,3660.82 11184.18,3693.92 11354.61,3693.92 11354.61,3800.61 11355,3801
  region: 9448,3801 9448,2866.92 9499,2866.92 9499,3015.54 9602.73,3119.27 ccw(c9585.19,3136.81) 9610,3136.81 9610,3316.12 9753.8,3459.92 9805.61,3459.92 9837.92,3427.61 9837.92,3324.39 9774.27,3260.73 ccw(c9792,3243) 9766.92,3243 9766.92,3105.31 9578.69,2917.08 9578.69,2867.69 9578,2867 9803.97,2867 9824.34,2846.63 ccw(c9835.53,2857.82) 9835.53,2842 9850,2842 9850,2891.46 9827.08,2914.39 9827.08,2966.13 9868.87,3007.92 9989.6,3007.92 ccw(c9989.6,3032.83) 10007.22,3015.22 10086.74,3094.74 10086.74,3209.71 10100.95,3223.92 10193.83,3223.92 10193.83,3538 10071.54,3538 10043.08,3566.46 10043.08,3660.82 10076.18,3693.92 10246.61,3693.92 10246.61,3800.61 10247,3801
  region: 8340,3801 8340,2866.92 8391,2866.92 8391,3015.54 8494.73,3119.27 ccw(c8477.19,3136.81) 8502,3136.81 8502,3316.12 8645.8,3459.92 8697.61,3459.92 8729.92,3427.61 8729.92,3324.39 8666.27,3260.73 ccw(c8684,3243) 8658.92,3243 8658.92,3105.31 8470.69,2917.08 8470.69,2867.69 8470,2867 8695.97,2867 8716.34,2846.63 ccw(c8727.53,2857.82) 8727.53,2842 8742,2842 8742,2891.46 8719.08,2914.39 8719.08,2966.13 8760.87,3007.92 8881.6,3007.92 ccw(c8881.6,3032.83) 8899.22,3015.22 8978.74,3094.74 8978.74,3209.71 8992.95,3223.92 9085.83,3223.92 9085.83,3538 8963.54,3538 8935.08,3566.46 8935.08,3660.82 8968.18,3693.92 9138.61,3693.92 9138.61,3800.61 9139,3801
  region: 7232,3801 7232,2866.92 7283,2866.92 7283,3015.54 7386.73,3119.27 ccw(c7369.19,3136.81) 7394,3136.81 7394,3316.12 7537.8,3459.92 7589.61,3459.92 7621.92,3427.61 7621.92,3324.39 7558.27,3260.73 ccw(c7576,3243) 7550.92,3243 7550.92,3105.31 7362.69,2917.08 7362.69,2867.69 7362,2867 7587.97,2867 7608.34,2846.63 ccw(c7619.53,2857.82) 7619.53,2842 7634,2842 7634,2891.46 7611.08,2914.39 7611.08,2966.13 7652.87,3007.92 7773.6,3007.92 ccw(c7773.6,3032.83) 7791.22,3015.22 7870.74,3094.74 7870.74,3209.71 7884.95,3223.92 7977.83,3223.92 7977.83,3538 7855.54,3538 7827.08,3566.46 7827.08,3660.82 7860.18,3693.92 8030.61,3693.92 8030.61,3800.61 8031,3801
  region: 6124,3801 6124,2866.92 6175,2866.92 6175,3015.54 6278.73,3119.27 ccw(c6261.19,3136.81) 6286,3136.81 6286,3316.12 6429.8,3459.92 6481.61,3459.92 6513.92,3427.61 6513.92,3324.39 6450.27,3260.73 ccw(c6468,3243) 6442.92,3243 6442.92,3105.31 6254.69,2917.08 6254.69,2867.69 6254,2867 6479.97,2867 6500.34,2846.63 ccw(c6511.53,2857.82) 6511.53,2842 6526,2842 6526,2891.46 6503.08,2914.39 6503.08,2966.13 6544.87,3007.92 6665.6,3007.92 ccw(c6665.6,3032.83) 6683.22,3015.22 6762.74,3094.74 6762.74,3209.71 6776.95,3223.92 6869.83,3223.92 6869.83,3538 6747.54,3538 6719.08,3566.46 6719.08,3660.82 6752.18,3693.92 6922.61,3693.92 6922.61,3800.61 6923,3801
  region: 5016,3801 5016,2866.92 5067,2866.92 5067,3015.54 5170.73,3119.27 ccw(c5153.19,3136.81) 5178,3136.81 5178,3316.12 5321.8,3459.92 5373.61,3459.92 5405.92,3427.61 5405.92,3324.39 5342.27,3260.73 ccw(c5360,3243) 5334.92,3243 5334.92,3105.31 5146.69,2917.08 5146.69,2867.69 5146,2867 5371.97,2867 5392.34,2846.63 ccw(c5403.53,2857.82) 5403.53,2842 5418,2842 5418,2891.46 5395.08,2914.39 5395.08,2966.13 5436.87,3007.92 5557.6,3007.92 ccw(c5557.6,3032.83) 5575.22,3015.22 5654.74,3094.74 5654.74,3209.71 5668.95,3223.92 5761.83,3223.92 5761.83,3538 5639.54,3538 5611.08,3566.46 5611.08,3660.82 5644.18,3693.92 5814.61,3693.92 5814.61,3800.61 5815,3801
  region: 3908,3801 3908,2866.92 3959,2866.92 3959,3015.54 4062.73,3119.27 ccw(c4045.19,3136.81) 4070,3136.81 4070,3316.12 4213.8,3459.92 4265.61,3459.92 4297.92,3427.61 4297.92,3324.39 4234.27,3260.73 ccw(c4252,3243) 4226.92,3243 4226.92,3105.31 4038.69,2917.08 4038.69,2867.69 4038,2867 4263.97,2867 4284.34,2846.63 ccw(c4295.53,2857.82) 4295.53,2842 4310,2842 4310,2891.46 4287.08,2914.39 4287.08,2966.13 4328.87,3007.92 4449.6,3007.92 ccw(c4449.6,3032.83) 4467.22,3015.22 4546.74,3094.74 4546.74,3209.71 4560.95,3223.92 4653.83,3223.92 4653.83,3538 4531.54,3538 4503.08,3566.46 4503.08,3660.82 4536.18,3693.92 4706.61,3693.92 4706.61,3800.61 4707,3801
  region: 2791,3801 2791,2866.92 2842,2866.92 2842,3015.54 2945.73,3119.27 ccw(c2928.19,3136.81) 2953,3136.81 2953,3316.12 3096.8,3459.92 3148.61,3459.92 3180.92,3427.61 3180.92,3324.39 3117.27,3260.73 ccw(c3135,3243) 3109.92,3243 3109.92,3105.31 2921.69,2917.08 2921.69,2867.69 2921,2867 3146.97,2867 3167.34,2846.63 ccw(c3178.53,2857.82) 3178.53,2842 3193,2842 3193,2891.46 3170.08,2914.39 3170.08,2966.13 3211.87,3007.92 3332.6,3007.92 ccw(c3332.6,3032.83) 3350.22,3015.22 3429.74,3094.74 3429.74,3209.71 3443.95,3223.92 3536.83,3223.92 3536.83,3538 3414.54,3538 3386.08,3566.46 3386.08,3660.82 3419.18,3693.92 3589.61,3693.92 3589.61,3800.61 3590,3801
  lines w10: 6299,526 6317,526 6320,523 7590,523
  lines w50: 6299,526 6299,1589 6352,1642 7479,1642 7590,1531 7590,523 ; 2815,2919 2842,2892 2932.08,2892 3135,3094.92 3135,3243 3206,3314 3206,3438 3159,3485 3086.42,3485 3068.79,3467.38 2928,3326.58 2928,3137 2815,3024 2815,2919 ; 2845.08,2601.92 2845.08,2651.08 2894,2700 3223,2700 3326.34,2803.34 3398.66,2803.34 3441,2761 3448,2754 3448,2622.08 3389.92,2564 2883,2564 2845.08,2601.92 ; 3145,2904 3145,2976.51 3201.49,3033 3332.6,3033 3404.66,3105.06 3404.66,3128.66 3404.66,3220.1 3433.57,3249 3547.22,3249 3576,3220.22 3576,3023 3575,3022 3575,3013.71 3428.22,2866.92 3182.08,2866.92 3145,2904 ; 3361,3556.08 3361,3671.21 3408.79,3719 3600,3719 3651.42,3667.58 3651.42,3558.42 3606,3513 3404.08,3513 3361,3556.08

## Silkscreen, mask and mechanical layers (free items; w line width, h text height)
Top Overlay:
  text "G" at 13540,3042 h60
  text "HV" at 13320,3037 h60
  text "#0" at 2281,2348 h60
  text "#1" at 3398,2348 h60
  text "#2" at 4515,2348 h60
  text "#3" at 5623,2348 h60
  text "#4" at 6731,2348 h60
  text "#5" at 7839,2348 h60
  text "#6" at 8947,2348 h60
  text "#7" at 10055,2348 h60
  text "#8" at 11163,2348 h60
  text "#9" at 12271,2348 h60
  text "G" at 13227,2082 h60
  text "GND" at 2429,1855 h60
  text "SCMLI V4 / Suzanne O'Meara/Yiou He / 8/15/19" at 2886,1844 h40
  text "GND" at 2104,1840 h60 r270
  text "5V" at 3305,1712 h60
  text "VIN" at 2106,1647 h60 r270
  text "G" at 3308,1432 h60
  text "9V" at 3292,1158 h60
Bottom Overlay:
  text "GND" at 2164,1842 h60 r90
  text "5V" at 3403,1712 h60
  text "G" at 3097,1696 h60
  text "VIN" at 2166,1647.15 h60 r90
  text "9V" at 3150,1469 h60
  text "G" at 3349,1431 h60
  text "9V" at 3394,1157 h60
Drill Drawing:
  text ".Legend" at 4325,1810 h60

## Text inside footprints (layer, text, board x,y; h text height)
U3_GM1: Bottom Overlay "*" at 3776,2385 h30 r270
U3_GM2: Bottom Overlay "*" at 4893,2385 h30 r270
U3_GM3: Bottom Overlay "*" at 6001,2385 h30 r270
U3_GM4: Bottom Overlay "*" at 7109,2385 h30 r270
U3_GM5: Bottom Overlay "*" at 8217,2385 h30 r270
U3_GM6: Bottom Overlay "*" at 9325,2385 h30 r270
U3_GM7: Bottom Overlay "*" at 10433,2385 h30 r270
U3_GM8: Bottom Overlay "*" at 11541,2385 h30 r270
U3_GM9: Bottom Overlay "*" at 12649,2385 h30 r270
U4_GM1: Bottom Overlay "*" at 3063.28,2420 h30 r270
U4_GM2: Bottom Overlay "*" at 4180.28,2420 h30 r270
U4_GM3: Bottom Overlay "*" at 5288.28,2420 h30 r270
U4_GM4: Bottom Overlay "*" at 6396.28,2420 h30 r270
U4_GM5: Bottom Overlay "*" at 7504.28,2420 h30 r270
U4_GM6: Bottom Overlay "*" at 8612.28,2420 h30 r270
U4_GM7: Bottom Overlay "*" at 9720.28,2420 h30 r270
U4_GM8: Bottom Overlay "*" at 10828.28,2420 h30 r270
U4_GM9: Bottom Overlay "*" at 11936.28,2420 h30 r270
U5_GM1: Bottom Overlay "*" at 3320,2420 h30 r270
U5_GM2: Bottom Overlay "*" at 4437,2420 h30 r270
U5_GM3: Bottom Overlay "*" at 5545,2420 h30 r270
U5_GM4: Bottom Overlay "*" at 6653,2420 h30 r270
U5_GM5: Bottom Overlay "*" at 7761,2420 h30 r270
U5_GM6: Bottom Overlay "*" at 8869,2420 h30 r270
U5_GM7: Bottom Overlay "*" at 9977,2420 h30 r270
U5_GM8: Bottom Overlay "*" at 11085,2420 h30 r270
U5_GM9: Bottom Overlay "*" at 12193,2420 h30 r270
U12: Bottom Overlay "*" at 2111,2384 h30 r270
U22: Bottom Overlay "*" at 6776.53,1378.66 h50 r90; Mechanical 13 "*" at 6791.53,1277.16 h50 r90
U74: Bottom Overlay "*" at 13050,2430 h30 r270
Ur1_GM1: Top Overlay "*" at 3333.31,2882.08 h50; Mechanical 13 "*" at 3398.86,2852.16 h50
Ur1_GM2: Top Overlay "*" at 4450.31,2882.08 h50; Mechanical 13 "*" at 4515.86,2852.16 h50
Ur1_GM3: Top Overlay "*" at 5558.31,2882.08 h50; Mechanical 13 "*" at 5623.86,2852.16 h50
Ur1_GM4: Top Overlay "*" at 6666.31,2882.08 h50; Mechanical 13 "*" at 6731.86,2852.16 h50
Ur1_GM5: Top Overlay "*" at 7774.31,2882.08 h50; Mechanical 13 "*" at 7839.86,2852.16 h50
Ur1_GM6: Top Overlay "*" at 8882.31,2882.08 h50; Mechanical 13 "*" at 8947.86,2852.16 h50
Ur1_GM7: Top Overlay "*" at 9990.31,2882.08 h50; Mechanical 13 "*" at 10055.86,2852.16 h50
Ur1_GM8: Top Overlay "*" at 11098.31,2882.08 h50; Mechanical 13 "*" at 11163.86,2852.16 h50
Ur1_GM9: Top Overlay "*" at 12206.31,2882.08 h50; Mechanical 13 "*" at 12271.86,2852.16 h50
Ur2: Top Overlay "*" at 1957.92,2293.31 h50 r90; Mechanical 13 "*" at 1987.84,2358.86 h50 r90
Ur3: Top Overlay "*" at 2216.31,2882.08 h50; Mechanical 13 "*" at 2281.86,2852.16 h50
Ur4: Bottom Overlay "*" at 2659,2385 h30 r270
Ur6: Bottom Overlay "*" at 6414,955.5 h30; Mechanical 13 "*" at 6363,928 h30
Ur7: Bottom Overlay "*" at 6414,1418.5 h30; Mechanical 13 "*" at 6363,1391 h30
Ur8: Bottom Overlay "*" at 6867,1468.5 h30 r270; Mechanical 13 "*" at 6839.5,1519.5 h30 r270
Ur9: Bottom Overlay "*" at 7267,1472.5 h30 r270; Mechanical 13 "*" at 7239.5,1523.5 h30 r270
Ur10: Bottom Overlay "*" at 7447.5,1240 h30 r180; Mechanical 13 "*" at 7498.5,1267.5 h30 r180